# Altium PCB Expansion_Card(1).PcbDoc
Units mm, origin at the board's own origin, x right, y up, seen from the top; angles counter-clockwise.
Board outline 26 x 30 mm, 2 copper layers (F.Cu, B.Cu); 11 components, 4 nets, 41 pads, 8 vias.
Unrouted connection lines stored in the file: 19.
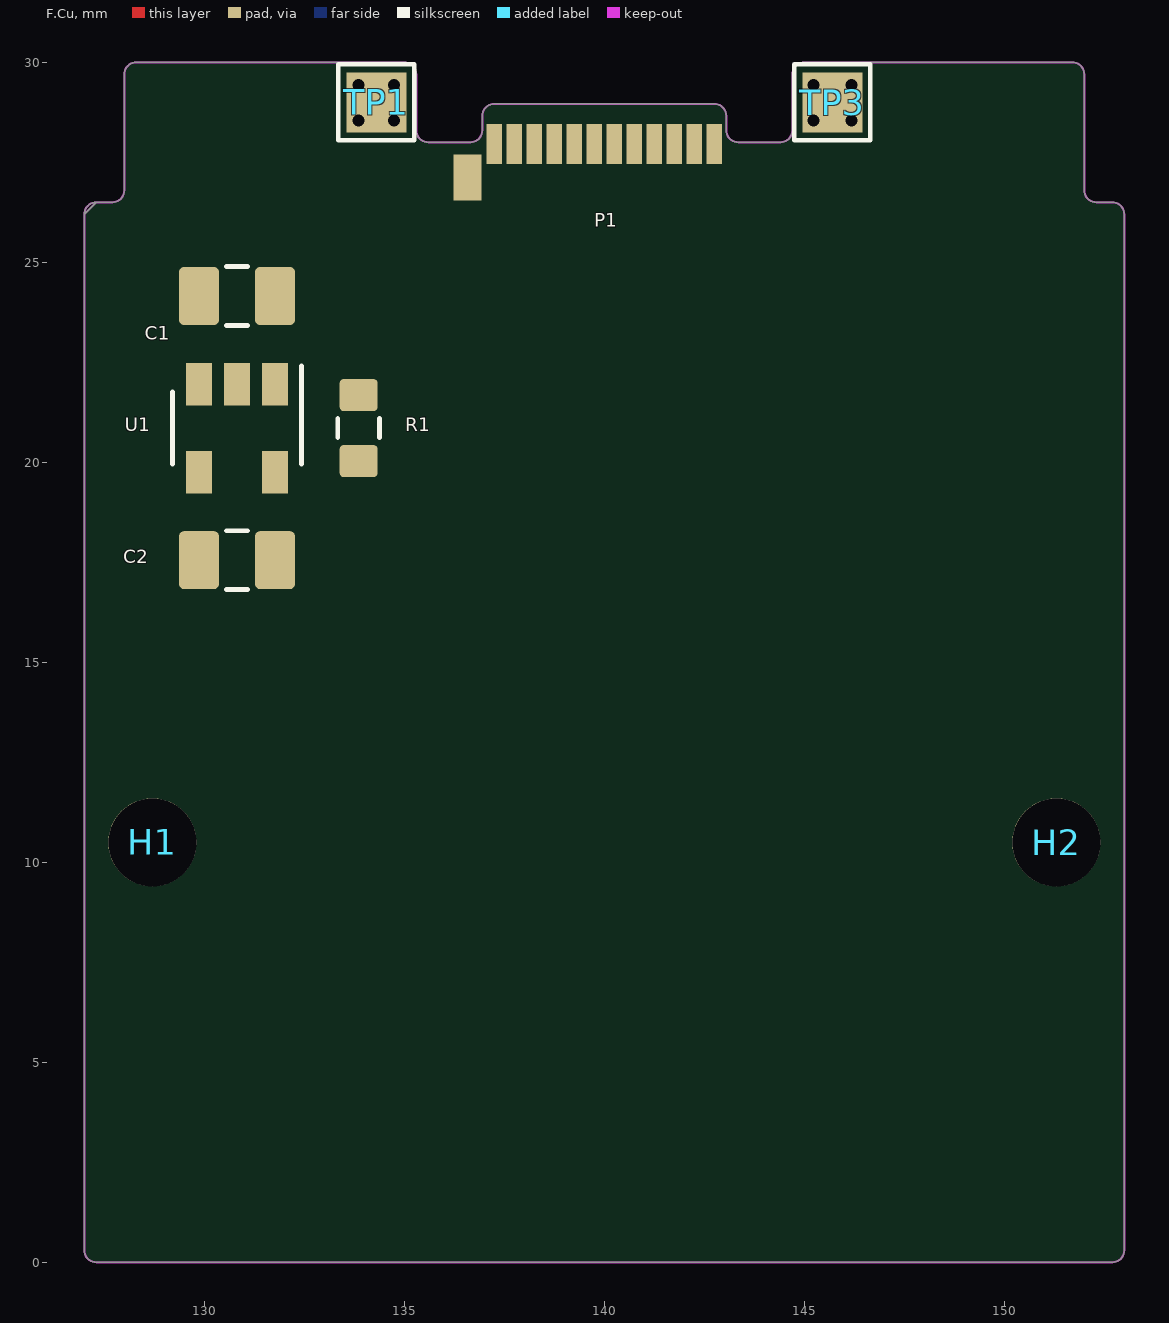
[diagram p0: F.Cu view]
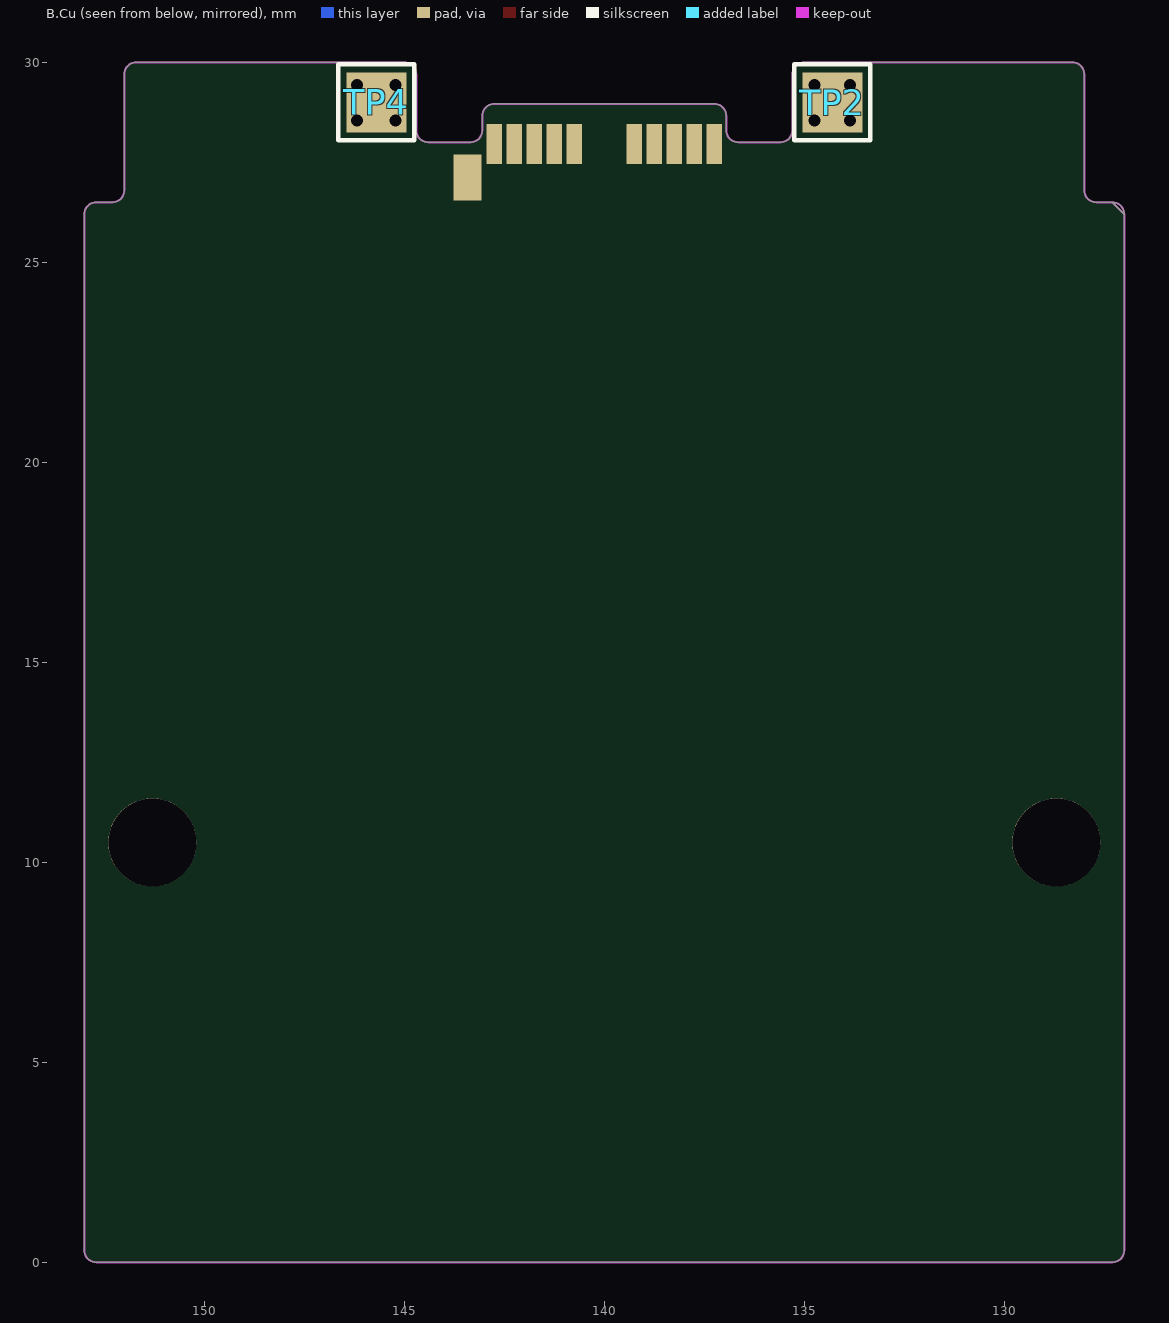
[diagram p1: B.Cu view, seen from below]

## Layer stack, top to bottom
F.Mask: solder mask 0.0102, Solder Resist, Dk 3.5
F.Cu: signal copper 0.0356
Dielectric 1: dielectric 0.32, FR-4, Dk 4.8
B.Cu: signal copper 0.0356
B.Mask: solder mask 0.0102, Solder Resist, Dk 3.5

## Board outline
127,26.2 cw(c127.3,26.2) 127.3,26.5 127.7,26.5 ccw(c127.7,26.8) 128,29.7 cw(c128.3,29.7) 135,30 cw(c135,29.7) 135.3,28.3 ccw(c135.6,28.3) 135.7,28 136.65,28 ccw(c136.65,28.3) 136.95,28.3 136.95,28.66 cw(c137.25,28.66) 137.25,28.96 142.75,28.96 cw(c142.75,28.66) 143.05,28.66 143.05,28.3 ccw(c143.35,28.3) 143.35,28 144.3,28 144.4,28 ccw(c144.4,28.3) 144.7,28.3 144.7,29.7 cw(c145,29.7) 145,30 151.7,30 cw(c151.7,29.7) 152,29.7 152,26.8 ccw(c152.3,26.8) 152.3,26.5 152.7,26.5 cw(c152.7,26.2) 153,26.2 153,0.3 cw(c152.7,0.3) 152.7,0 127.3,0 cw(c127.3,0.3) 127,0.3 127,26.2 cw(c127.3,26.2) 127,26.2

## Design rules (kind name [scope] priority, off if disabled: settings)
Clearance "Clearence 0.2_NetClass" [InNetClass('Default')] p1: gap=0.2 ignorepadtopadclearanceinfootprint=FALSE
HoleSize "Hole Size (Default)" [All] p1: absolutevalues=TRUE maxlimit=10 minlimit=0 maxpercent=80.000 minpercent=20.000
MinimumSolderMaskSliver [All] p1: minsoldermaskwidth=0
PolygonConnect [All] p1: connectstyle=Direct reliefconductorwidth=0.254 reliefentries=4 polygonreliefangle="90 Angle" airgapwidth=0.254
RoutingVias [All] p1: holewidth=0.711 width=1.27 viastyle="Through Hole" minholewidth=0.711 minwidth=1.27 maxholewidth=0.711 maxwidth=1.27
SilkToSilkClearance [All] p1: silktosilkclearance=0
SilkToSolderMaskClearance [IsPad] p1: minsilkscreentomaskgap=0 clearancetoexposedcopper=TRUE
SolderMaskExpansion [All] p1: expansion=0.102 istentingtop=FALSE
Width [All] p1: maxlimit=10 minlimit=0.152 preferedwidth=0.25 minimp=50.000000 maximp=50.000000 favimp=50.000000
26 further rules are at their usual default settings.

## Classes and differential pairs
net class Default: +3V3 GND Net-(P1-PadA5) VBUS

## Components (designator, comment, footprint, x,y, rotation, side; value= is the part's Value field where it differs from the comment)
C1 "10uF" C_0805_2012Metric 130.818,24.158 r180 top
C2 "10uF" C_0805_2012Metric 130.818,17.554 r180 top
H1 "MountingHole" MountingHole_2.2mm_M2 128.7,10.5 r0 top
H2 "MountingHole" MountingHole_2.2mm_M2 151.3,10.5 r0 top
P1 "USB_C_Plug_USB2.0" USB_C_Plug_Molex_105444 140,28 r0 top
R1 "5.1k" R_0603_1608Metric 133.858,20.856 r270 top
TP1 "TestPoint" TestPoint_Pad_1.5x1.5mm 134.3,29 r0 top
TP2 "TestPoint" TestPoint_Pad_1.5x1.5mm 134.3,29 r180 bottom
TP3 "TestPoint" TestPoint_Pad_1.5x1.5mm 145.7,29 r0 top
TP4 "TestPoint" TestPoint_Pad_1.5x1.5mm 145.7,29 r180 bottom
U1 "AP2112K-3.3" SOT-23-5 130.818,20.856 r270 top

## Footprints (in the part's own frame and the unit in brackets; to place one, negate y for a bottom-side part, rotate by r counter-clockwise, add the part's x,y. Pads: shape width x height; smd on the part's side, far side on the other; paste and mask are expansions set on the pad)
C_0805_2012Metric [mm]
  rrect25% 1x1.45 smd mask+0: 1(-0.95,0) 2(0.95,0)
  silkscreen extent -0.26,-0.73 0.26,0.73
MountingHole_2.2mm_M2 [mm]
  round 2.2 hole 2.2 paste-2.2 mask+0: 1(0,0)
R_0603_1608Metric [mm]
  rrect25% 0.8x0.95 smd mask+0: 1(-0.825,0) 2(0.825,0)
  silkscreen extent -0.24,-0.52 0.24,0.52
SOT-23-5 [mm]
  rect 1.06x0.65 smd mask+0: 1(-1.1,0.95) 2(-1.1,0) 3(-1.1,-0.95) 4(1.1,-0.95) 5(1.1,0.95)
  silkscreen extent -1.55,-1.61 0.9,1.61
TestPoint_Pad_1.5x1.5mm [mm]
  rect 1.5x1.5 smd paste-1.5 mask+0: 1(0,0)
  silkscreen extent -0.95,-0.95 0.95,0.95
USB_C_Plug_Molex_105444 [mm]
  rect 0.38x1 smd mask+0: A1(-2.75,-0.04) A2(-2.25,-0.04) A3(-1.75,-0.04) A4(-1.25,-0.04) A5(-0.75,-0.04) A6(-0.25,-0.04) A7(0.25,-0.04) A8(0.75,-0.04) A9(1.25,-0.04) A10(1.75,-0.04) A11(2.25,-0.04) A12(2.75,-0.04)
  rect 0.38x1 smd far side mask+0: B1(2.75,-0.04) B2(2.25,-0.04) B3(1.75,-0.04) B4(1.25,-0.04) B5(0.75,-0.04) B8(-0.75,-0.04) B9(-1.25,-0.04) B10(-1.75,-0.04) B11(-2.25,-0.04) B12(-2.75,-0.04)
  rect 0.7x1.15 smd mask+0: S1(-3.42,-0.88)
  rect 0.7x1.15 smd far side mask+0: S1(3.42,-0.88)

## Part data
C1 C2: library part C_0805_2012Metric, "Capacitor SMD 0805 (2012 Metric), square (rectangular) end terminal, IPC_7351 nominal, (Body size source: IPC-SM-782 page 76, https://www.pcb-3d.com/wordpress/wp-content/uploads/ipc-sm-782a_amendment_1_and_2.pdf, https://docs.google.com/spreadsheets/d/1BsfQQcO9C6DZCsRaXUlFlo91Tg2WpOkGARC1WS5S8t0/edit?usp=sharing), generated with kicad-footprint-generator"
H1 H2: library part MountingHole_2.2mm_M2, "Mounting Hole 2.2mm, no annular, M2"
P1: library part USB_C_Plug_Molex_105444, "Universal Serial Bus (USB) Shielded I/O Plug, Type C, Right Angle, Surface Mount, http://www.molex.com/pdm_docs/sd/1054440001_sd.pdf"
R1: library part R_0603_1608Metric, "Resistor SMD 0603 (1608 Metric), square (rectangular) end terminal, IPC_7351 nominal, (Body size source: IPC-SM-782 page 72, https://www.pcb-3d.com/wordpress/wp-content/uploads/ipc-sm-782a_amendment_1_and_2.pdf), generated with kicad-footprint-generator"
TP1 TP2 TP3 TP4: library part TestPoint_Pad_1.5x1.5mm, "SMD rectangular pad as test Point, square 1.5mm side length"
U1: library part SOT-23-5, "5-pin SOT23 package"

## Via types
v1: diameter 0.5, hole 0.3, F.Cu to B.Cu, tented both sides, 8 vias

## Nets (pads, with @x,y where several pads share a name; then routed paths per layer and width w, separated by ;. In a path a pad name is that pad's centre, name@x,y a point inside that pad or via, vN(x,y) a via of type N, cw(c..) or ccw(c..) an arc to the next point about the centre after c; other vN are vias at no path point)
+3V3: C2.1 U1.5
GND: C1.2 C2.2 P1.A1 P1.A12 P1.B1 P1.B12 P1.S1 R1.2 TP1.1 TP2.1 TP3.1 TP4.1 U1.2
  other v1: 133.858,28.54 134.747,28.54 145.225,28.54 146.177,28.54 133.858,29.429 134.747,29.429 145.225,29.429 146.177,29.429
Net-(P1-PadA5): P1.A5 R1.1
VBUS: C1.1 P1.A4 P1.A9 P1.B4 P1.B9 U1.1 U1.3
pads on no net: H1.1 H2.1 P1.A2 P1.A3 P1.A6 P1.A7 P1.A8 P1.A10 P1.A11 P1.B2 P1.B3 P1.B5 P1.B8 P1.B10 P1.B11 U1.4

## Keep-outs
Edge.Cuts:
  lines w0.05: 127,0.3 ccw(c127.3,0.3) 127.3,0 ; 127,0.3 ccw(c127.3,0.3) 127.3,0 ; 127,0.3 127,26.2 ; 127,0.3 127,26.2 ; 127,26.2 cw(c127.3,26.2) 127.3,26.5 ; 127,26.2 cw(c127.3,26.2) 127.3,26.5 ; 127,26.2 cw(c127.3,26.2) 127.3,26.5 ; 127,26.2 cw(c127.3,26.2) 127.3,26.5 ; 127,26.2 127.3,26.5 ; 127.3,0 152.7,0 ; 127.3,0 152.7,0 ; 127.3,26.5 127.7,26.5 ; 127.3,26.5 127.7,26.5 ; 127.7,26.5 ccw(c127.7,26.8) 128,26.8 ; 127.7,26.5 ccw(c127.7,26.8) 128,26.8 ; 128,26.8 128,29.7 ; 128,26.8 128,29.7 ; 128,29.7 cw(c128.3,29.7) 128.3,30 ; 128,29.7 cw(c128.3,29.7) 128.3,30 ; 128.3,30 135,30 ; 128.3,30 135,30 ; 135,30 cw(c135,29.7) 135.3,29.7 ; 135,30 cw(c135,29.7) 135.3,29.7 ; 135.3,28.3 ccw(c135.6,28.3) 135.6,28 ; 135.3,28.3 ccw(c135.6,28.3) 135.6,28 ; 135.3,28.3 135.3,29.7 ; 135.3,28.3 135.3,29.7 ; 135.6,28 135.7,28 ; 135.6,28 135.7,28 ; 135.6,28 135.7,28 ; 135.7,28 136.65,28 ; 135.7,28 136.65,28 ; 136.65,28 ccw(c136.65,28.3) 136.95,28.3 ; 136.65,28 ccw(c136.65,28.3) 136.95,28.3 ; 136.95,28.3 136.95,28.66 ; 136.95,28.3 136.95,28.66 ; 136.95,28.66 cw(c137.25,28.66) 137.25,28.96 ; 136.95,28.66 cw(c137.25,28.66) 137.25,28.96 ; 137.25,28.96 142.75,28.96 ; 137.25,28.96 142.75,28.96 ; 142.75,28.96 cw(c142.75,28.66) 143.05,28.66 ; 142.75,28.96 cw(c142.75,28.66) 143.05,28.66 ; 143.05,28.3 ccw(c143.35,28.3) 143.35,28 ; 143.05,28.3 ccw(c143.35,28.3) 143.35,28 ; 143.05,28.3 143.05,28.66 ; 143.05,28.3 143.05,28.66 ; 143.35,28 144.3,28 ; 143.35,28 144.3,28 ; 144.3,28 144.4,28 ; 144.3,28 144.4,28 ; 144.3,28 144.4,28 ; 144.4,28 ccw(c144.4,28.3) 144.7,28.3 ; 144.4,28 ccw(c144.4,28.3) 144.7,28.3 ; 144.7,28.3 144.7,29.7 ; 144.7,28.3 144.7,29.7 ; 144.7,29.7 cw(c145,29.7) 145,30 ; 144.7,29.7 cw(c145,29.7) 145,30 ; 145,30 151.7,30 ; 145,30 151.7,30 ; 151.7,30 cw(c151.7,29.7) 152,29.7 ; 151.7,30 cw(c151.7,29.7) 152,29.7 ; 152,26.8 ccw(c152.3,26.8) 152.3,26.5 ; 152,26.8 ccw(c152.3,26.8) 152.3,26.5 ; 152,26.8 152,29.7 ; 152,26.8 152,29.7 ; 152.3,26.5 152.7,26.5 ; 152.3,26.5 152.7,26.5 ; 152.7,0 ccw(c152.7,0.3) 153,0.3 ; 152.7,0 ccw(c152.7,0.3) 153,0.3 ; 152.7,26.5 cw(c152.7,26.2) 153,26.2 ; 152.7,26.5 cw(c152.7,26.2) 153,26.2 ; 153,0.3 153,26.2 ; 153,0.3 153,26.2

## Text inside footprints (layer, text, board x,y; h text height)
P1: Dwgs.User "PCB Edge" at 138.987,28.751 h0.5